# EAGLE board final board (EAGLE 9.6.2)
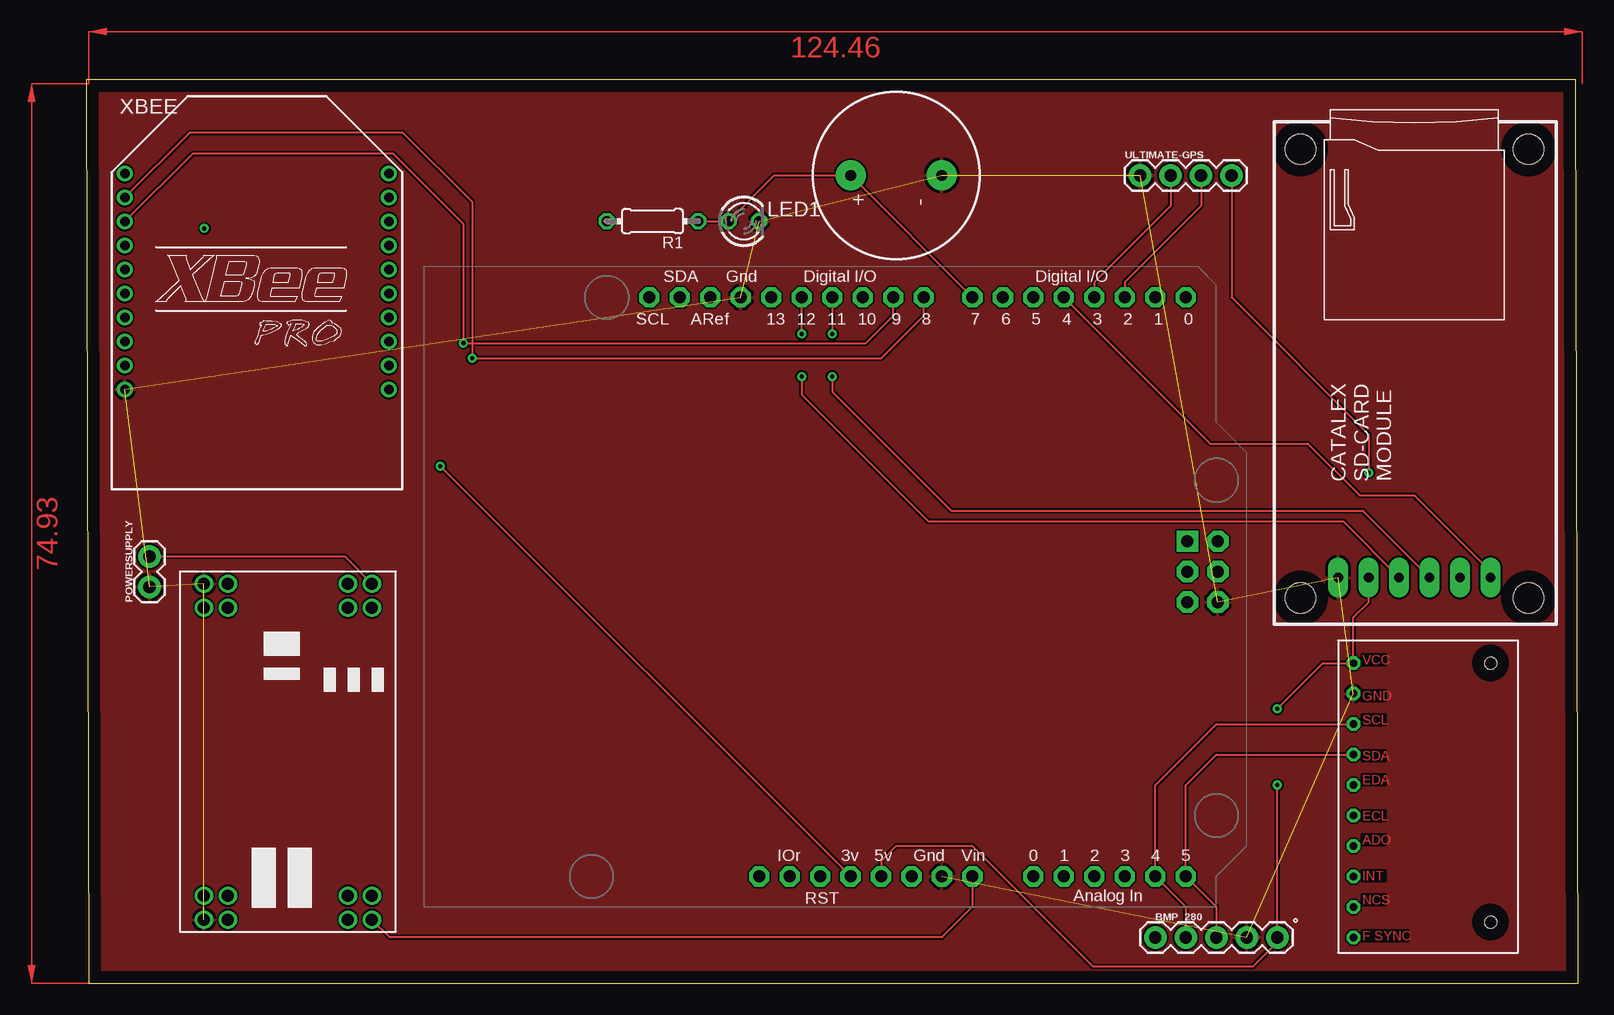
[diagram p0: board, top side]
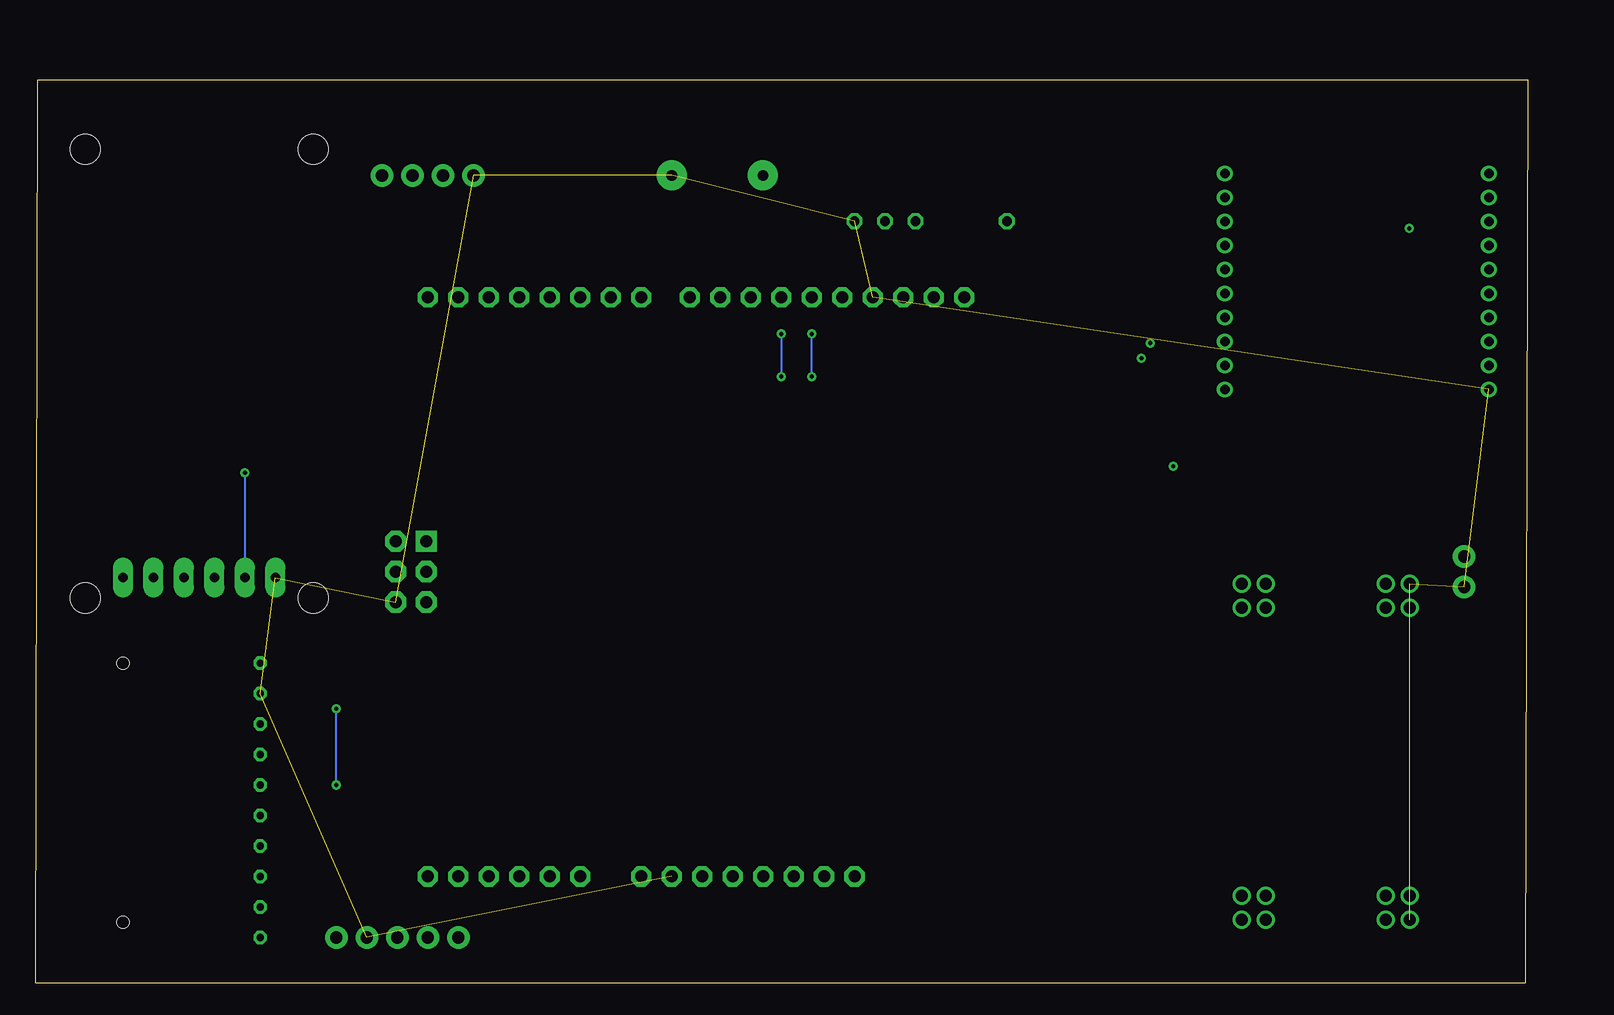
[diagram p1: board, bottom side, seen from below]

Size 124.33 x 75.3 mm. Coordinates in mm from the lower left corner, seen from the top.
Outline: 0.2,0 124.33,0 124.13,75.3 0,75.3 0.2,0
Copper layers (1*16): Top 0.035mm / dielectric 1.5mm / Bottom 0.035mm
Design rules "default": minimum track width 6mil, minimum drill 0.35mm, track to track 6mil, track to pad 6mil, pad to pad 6mil, via to via 6mil, smd to smd 6mil, copper to edge 40mil, drill to drill 6mil, minimum pad ring 10mil, minimum via ring 8mil, stop-mask expansion 4mil, vias tented up to drill 0mil, thermal gap 10mil

## Footprints (pad centres in the part's own frame; a part is rotated, then mirrored left to right if it is on the bottom)
1X05 = drill 1.016 pad 1.88: 1 0,0; 2 2.54,0; 3 5.08,0; 4 7.62,0; 5 10.16,0
LED3MM = drill 0.813 octagon: A -1.27,0; K 1.27,0
ARDUINOR3_ICSP_NODIM = drill 1 pad 1.676 octagon: 3V 35.56,2.54; 5V 38.1,2.54; A0 50.8,2.54; A1 53.34,2.54; A2 55.88,2.54; A3 58.42,2.54; A4 60.96,2.54; A5 63.5,2.54; AREF 23.876,50.8; D0 63.5,50.8; D1 60.96,50.8; D2 58.42,50.8; D3 55.88,50.8; D4 53.34,50.8; D5 50.8,50.8; D6 48.26,50.8; D7 45.72,50.8; D8 41.656,50.8; D9 39.116,50.8; D10 36.576,50.8; D11 34.036,50.8; D12 31.496,50.8; D13 28.956,50.8; GND 26.416,50.8; GND@1 43.18,2.54; GND@2 40.64,2.54; IOREF 30.48,2.54; RESERVED 27.94,2.54; RESET 33.02,2.54; SCL 18.796,50.8; SDA 21.336,50.8; VIN 45.72,2.54 | drill 1 pad 1.778 octagon: 5V_ICSP 66.167,30.48; GND@3 66.167,25.4; MOSI 66.167,27.94; RESET_ICSP 63.627,25.4; SCK 63.627,27.94 | drill 1 pad 1.778 square: MISO 63.627,30.48
CARD-SD-ADAPTER-CATALEX = drill 0.8 pad 1.676 long: CS -17,-6.35; GND -17,6.35; MISO -17,1.27; MOSI -17,-1.27; SCK -17,-3.81; VCC5V -17,3.81 | hole 2.5: -18.7,9.5; 18.7,9.5; 18.7,-9.5; -18.7,-9.5
1X02 = drill 1.016 pad 1.88: 1 0,0; 2 2.54,0
0204/7 = drill 0.813 octagon: 1 -3.81,0; 2 3.81,0
MPU-6500/9250 = drill 0.6 octagon: ADO 1.27,8.89; ECL 1.27,11.43; EDA 1.27,13.97; F-SYNC 1.27,1.27; GND 1.27,21.59; INT 1.27,6.35; NCS 1.27,3.81; SCL 1.27,19.05; SDA 1.27,16.51; VCC 1.27,24.13 | hole 1: 12.7,24.13; 12.7,2.54
CPI-137-83T = drill 0.9 pad 2.5: + 0,3.8; - 0,-3.8
4R7-REGULATOR = drill 1: P$2 3,16; P$3 3,14; P$6 3,2; P$7 3,4; P$10 27,16; P$11 27,14; P$14 27,2; P$15 27,4; VIN+ 1,16; VIN+1 1,14; VIN- 1,2; VIN-1 1,4; VOUT+ 29,16; VOUT+1 29,14; VOUT- 29,2; VOUT-1 29,4
1X04 = drill 1.016 pad 1.88: 1 0,0; 2 2.54,0; 3 5.08,0; 4 7.62,0
XBEE-PRO = drill 0.8 pad 1.27: 1 -11,9; 2 -11,7; 3 -11,5; 4 -11,3; 5 -11,1; 6 -11,-1; 7 -11,-3; 8 -11,-5; 9 -11,-7; 10 -11,-9; 11 11,-9; 12 11,-7; 13 11,-5; 14 11,-3; 15 11,-1; 16 11,1; 17 11,3; 18 11,5; 19 11,7; 20 11,9

## Placement (x,y rotation side)
BMP_280  [1X05]  89.1,3.81 0 top
LED1  [LED3MM]  54.81,63.5 0 top
M1  ARDUINO_R3_ICSP_NODIM  [ARDUINOR3_ICSP_NODIM]  28.14,6.35 0 top
MOD1  CARD-SD-ADAPTER-CATALEX  [CARD-SD-ADAPTER-CATALEX]  110.69,50.8 90 top
POWERSUPPLY  [1X02]  5.28,33.02 90 top
R1  [0204/7]  47.19,63.5 180 top
U$1  [MPU-6500/9250]  104.34,2.54 0 top
U$2  CPI-137-83T  [CPI-137-83T]  67.51,67.31 90 top
U$3  4R7-REGULATOR  [4R7-REGULATOR]  7.82,34.29 270 top
ULTIMATE-GPS  [1X04]  87.83,67.31 0 top
XBEE  XBEE-PRO  [XBEE-PRO]  14.22,58.47 0 top

## Library data of the parts
BMP_280 = SparkFun-Connectors-bmp
LED1 = led
M1 = adafruit
MOD1 = SD-Card-Module_CATALEX
POWERSUPPLY = SparkFun-Connectors1
R1 = rcl; SPICEPREFIX: R
U$1 = MPU6500-9250
U$2 = buzzer
U$3 = 4R7-regulator
ULTIMATE-GPS = SparkFun-Connectors; PROD_ID: CONN-09696
XBEE = xbee; MPN: XBP24-AWI-001; OC_FARNELL: 1337916; OC_NEWARK: 42M2667

## Nets
5V: BMP_280.5 M1.5V MOD1.VCC5V U$1.VCC ULTIMATE-GPS.4
+12V: POWERSUPPLY.2 U$3.VIN+
BUZZER: LED1.A M1.D7 R1.1 U$2.+
CLK: MOD1.SCK
CS: M1.D4 MOD1.CS
GND: BMP_280.4 LED1.K M1.GND M1.GND@1 M1.GND@3 MOD1.GND POWERSUPPLY.1 U$1.GND U$2.- U$3.VIN- U$3.VOUT- ULTIMATE-GPS.1 XBEE.10
GRX: M1.D2 ULTIMATE-GPS.3
GTX: M1.D3 ULTIMATE-GPS.2
MISO: M1.D12 MOD1.MISO
MOSI: M1.D11 MOD1.MOSI
RX: M1.D9 XBEE.3
S$1: XBEE.1
SCK: M1.D13
SCL: BMP_280.3 M1.A5 U$1.SDA
SDA: BMP_280.2 M1.A4 U$1.SCL
TX: M1.D8 XBEE.2
VCC: M1.3V
VIN: M1.VIN U$3.VOUT+

## Tracks (layer width: path | path; a pad name or v marks a point on that pad's centre or on a via)
5V  (via drill 0.35)
  Top 0.152: v99.26,16.51 BMP_280.5 99.26,3.43 97.21,1.37 83.92,1.37 73.86,11.43 67.51,11.43 66.24,10.16 M1.5V | v99.26,22.86 103.07,26.67 U$1.VCC 105.61,30.48 106.88,31.75 MOD1.VCC5V | ULTIMATE-GPS.4 95.45,57.15 106.88,45.72 v106.88,42.55
  Bottom 0.152: v99.26,16.51 v99.26,22.86 | v106.88,42.55 MOD1.VCC5V
+12V
  Top 0.152: POWERSUPPLY.2 21.55,35.56 U$3.VIN+
BUZZER
  Top 0.152: R1.1 LED1.A 57.35,67.31 U$2.+ M1.D7
CS
  Top 0.152: M1.D4 93.68,44.96 101.8,44.96 106.12,40.64 110.69,40.64 117.04,34.29 MOD1.CS
GND  (12 unrouted)
  pour Top: 0.2,0 124.66,0 124.66,74.93 0.2,74.93
GRX
  Top 0.152: ULTIMATE-GPS.3 92.91,64.77 86.56,58.42 M1.D2
GTX
  Top 0.152: ULTIMATE-GPS.2 90.37,64.77 84.02,58.42 M1.D3
MISO  (via drill 0.35)
  Top 0.152: MOD1.MISO 104.74,38.48 70.18,38.48 59.64,49.02 v59.64,50.55 | v59.64,54.1 M1.D12
  Bottom 0.152: v59.64,50.55 v59.64,54.1
MOSI  (via drill 0.35)
  Top 0.152: MOD1.MOSI 106.39,39.37 72.09,39.37 62.18,49.28 v62.18,50.55 | M1.D11 v62.18,54.1
  Bottom 0.152: v62.18,54.1 v62.18,50.55
RX  (via drill 0.35)
  Top 0.152: XBEE.3 8.89,69.13 25.58,69.13 31.44,63.27 v31.44,53.34 64.97,53.34 67.26,55.63 M1.D9
S$1
  Top 0.152: XBEE.1 3.35,67.34
S$2  (via drill 0.35)
  other vias: 9.86,62.89
S$3
  Top 0.152: 9.86,62.84 9.91,62.89 9.93,62.89
SCL
  Top 0.152: BMP_280.3 94.18,6.35 M1.A5 91.64,16.51 94.18,19.05 U$1.SDA
SDA
  Top 0.152: BMP_280.2 91.64,6.35 M1.A4 89.1,16.51 94.18,21.59 U$1.SCL
TX  (via drill 0.35)
  Top 0.152: XBEE.2 8.63,70.88 26.39,70.88 32.17,65.1 v32.17,52.07 66.24,52.07 69.8,55.63 M1.D8
VCC  (via drill 0.35)
  Top 0.152: v29.52,43.07 M1.3V
VIN
  Top 0.152: M1.VIN 73.86,6.35 71.32,3.81 25.3,3.81 U$3.VOUT+
(copper drawn outside any net)
  shapes: Top area x2